# Altium PCB H-Bridge.PcbDoc
Units mil, origin at the board's own origin, x right, y up, seen from the top; angles counter-clockwise.
Board outline 2573 x 2749 mil, 2 copper layers (Top Layer, Bottom Layer); 15 components, 13 nets, 36 pads, 4 vias.
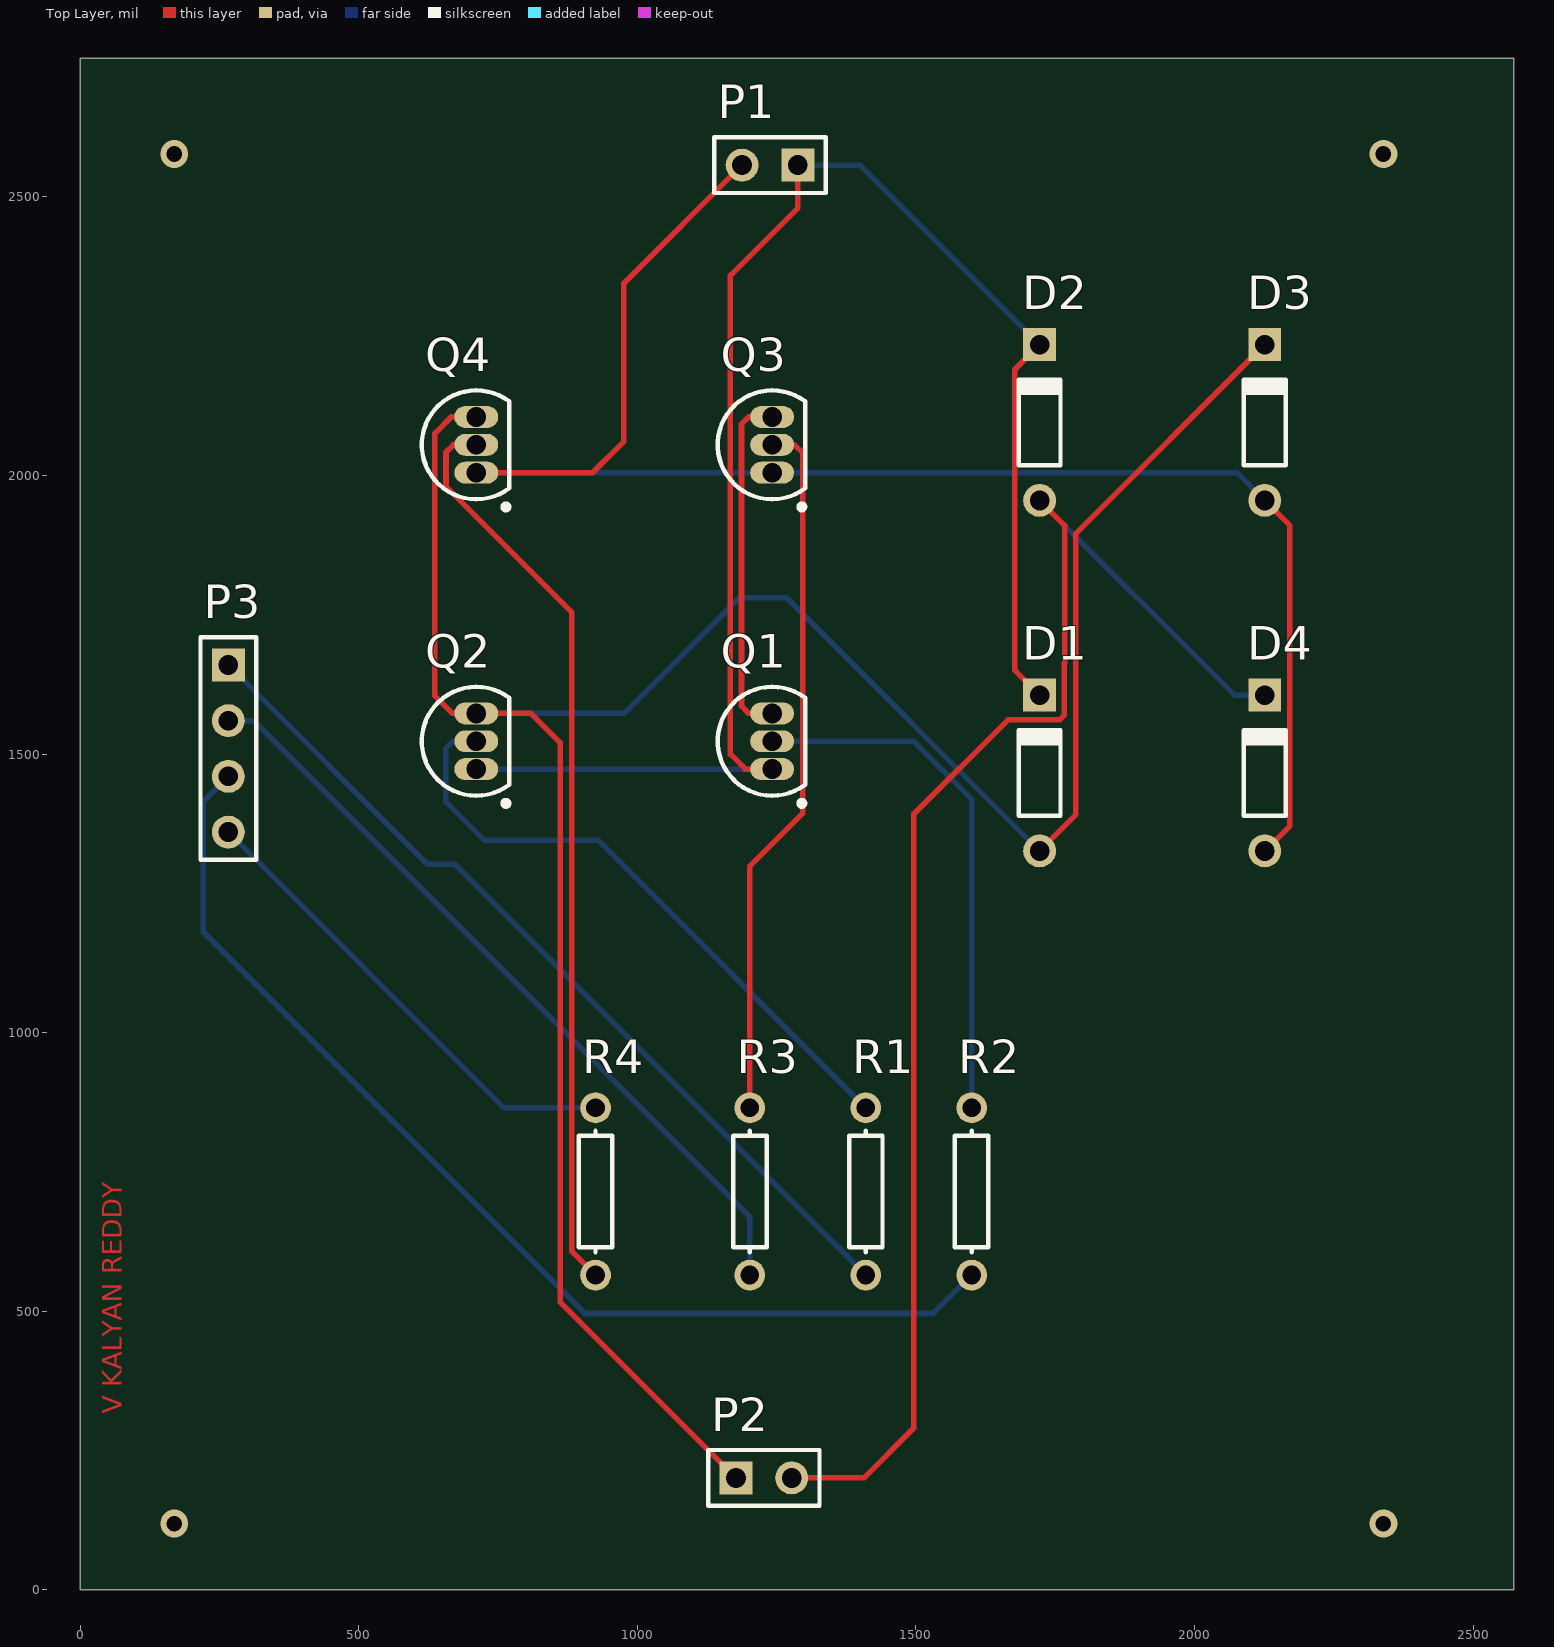
[diagram p0: Top Layer view]
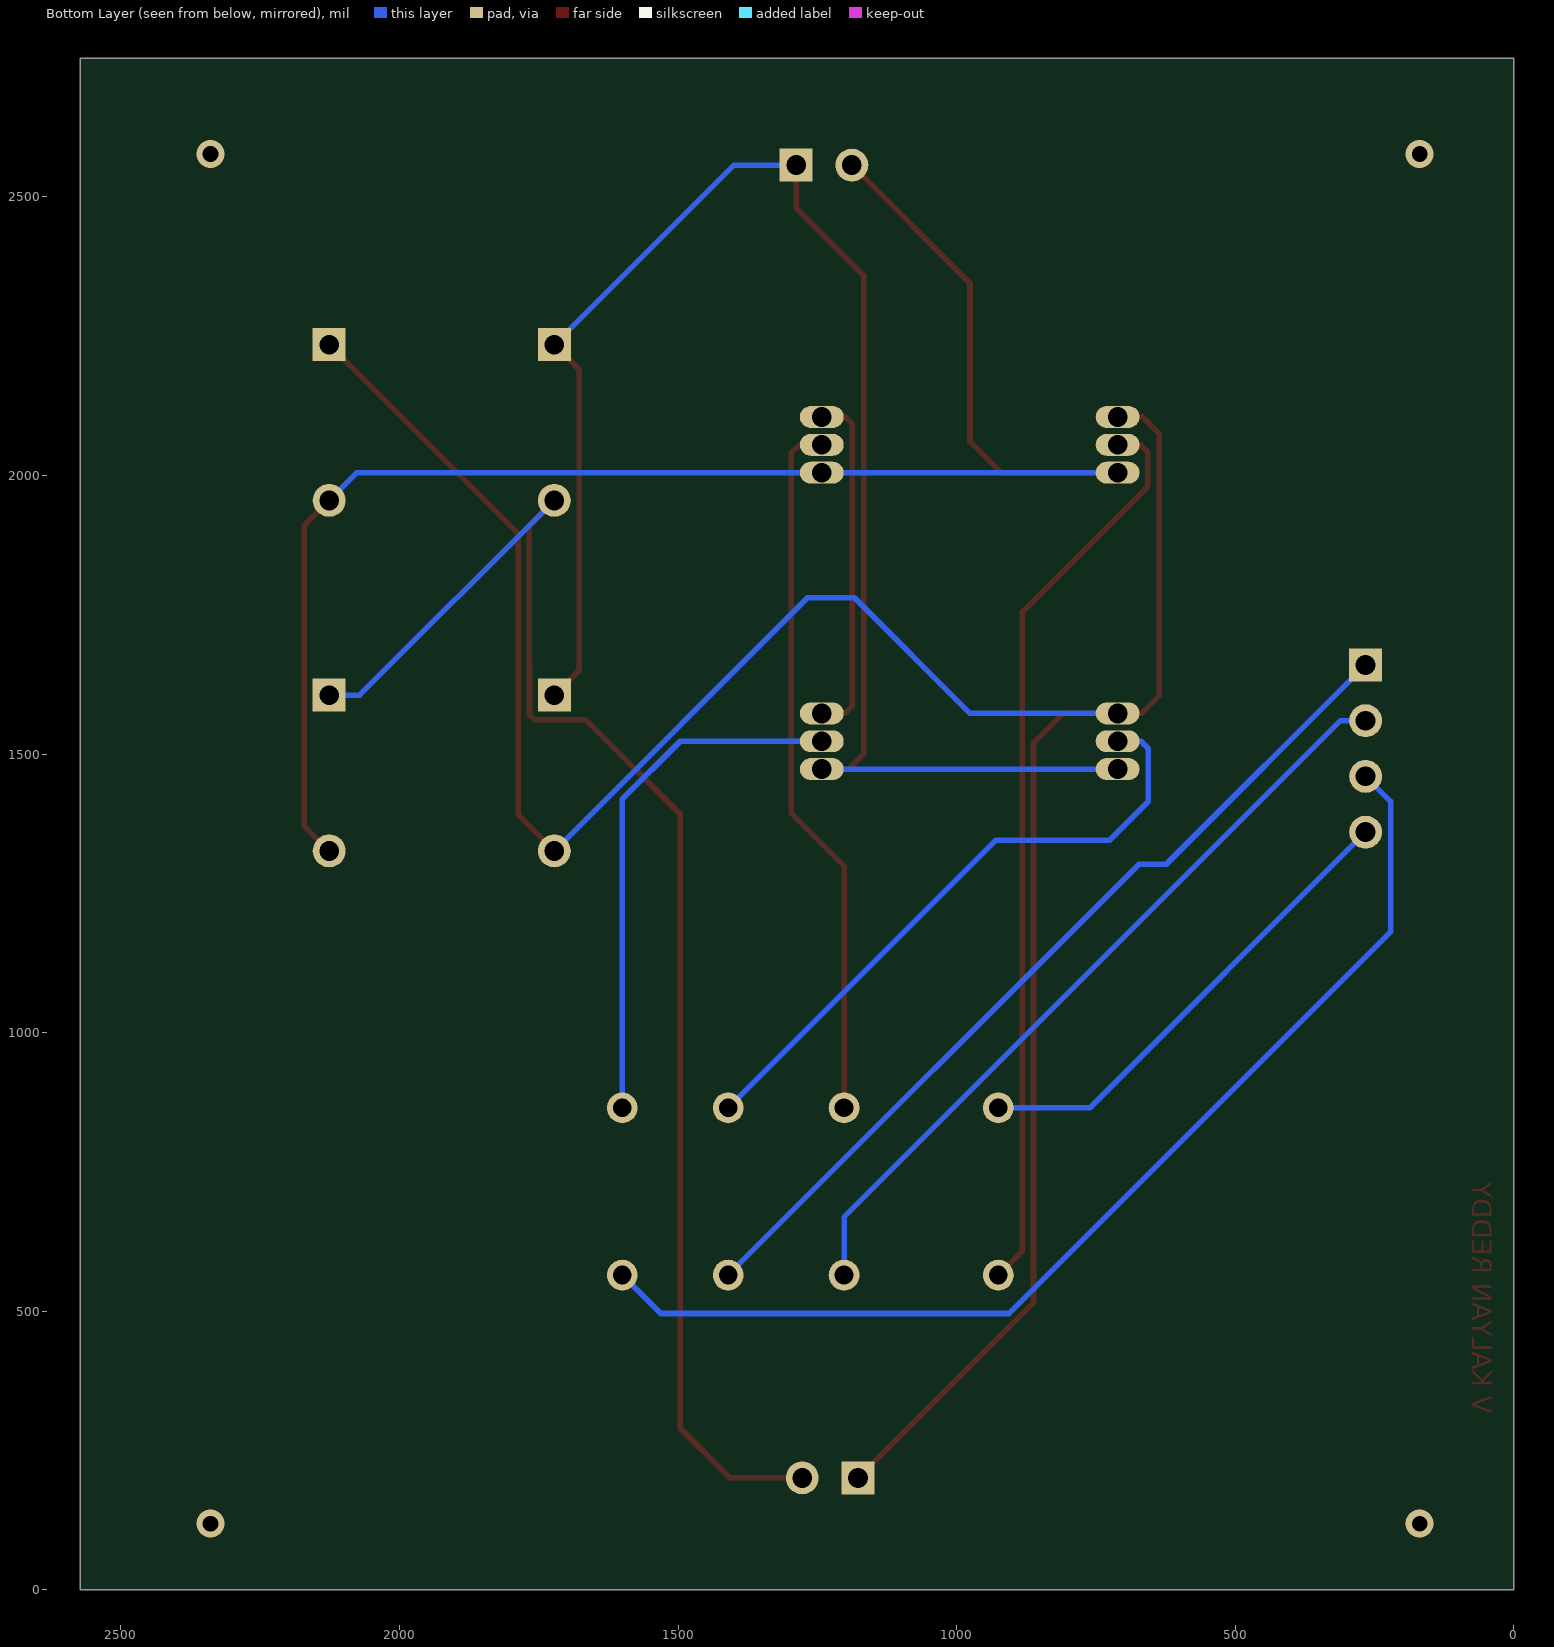
[diagram p1: Bottom Layer view, seen from below]

## Layer stack, top to bottom
Top Solder: solder mask 0.4, Solder Resist, Dk 3.5
Top Layer: signal copper 1.4
Dielectric 1: dielectric 12.6, FR-4, Dk 4.8
Bottom Layer: signal copper 1.4
Bottom Solder: solder mask 0.4, Solder Resist, Dk 3.5

## Board outline
0,0 2573,0 2573,2749 0,2749

## Design rules (kind name [scope] priority, off if disabled: settings)
Clearance [All] p1: gap=10 ignorepadtopadclearanceinfootprint=FALSE except(0: Arc-Hole Track-Hole SMDPad-Hole THPad-Hole Via-Hole Fill-Hole Poly-Hole Region-Hole Text-Hole)
PolygonConnect [All] p1: connectstyle=Relief reliefconductorwidth=10 reliefentries=4 polygonreliefangle="90 Angle" airgapwidth=10
RoutingVias [All] p1: holewidth=28 width=50 viastyle="Through Hole" minholewidth=28 minwidth=50 maxholewidth=28 maxwidth=50
SolderMaskExpansion [All] p1: expansion=4 istentingtop=FALSE
Width [All] p1: maxlimit=10 minlimit=10 preferedwidth=10
30 further rules are at their usual default settings.

## Components (designator, comment, footprint, x,y, rotation, side; value= is the part's Value field where it differs from the comment)
D1 "Diode 1N914" DO-35 1722,1466 r90 top
D2 "Diode 1N914" DO-35 1722,2095 r90 top
D3 "Diode 1N914" DO-35 2126,2095 r90 top
D4 "Diode 1N914" DO-35 2126,1466 r90 top
P1 "Header 2" HDR1X2 1288,2557 r180 top
P2 "Header 2" HDR1X2 1177,201 r0 top
P3 "Header 4" HDR1X4 266,1660 r270 top
Q1 "2N3906" TO-92A 1242,1523 r0 top
Q2 "2N3906" TO-92A 711,1523 r0 top
Q3 "2N3904" TO-92A 1242,2055 r0 top
Q4 "2N3904" TO-92A 711,2055 r0 top
R1 "Res1" AXIAL-0.3 1410,715 r90 top value=1K
R2 "Res1" AXIAL-0.3 1600,715 r270 top value=1K
R3 "Res1" AXIAL-0.3 1202,715 r270 top value=1K
R4 "Res1" AXIAL-0.3 925,715 r270 top value=1K

## Footprints (in the part's own frame and the unit in brackets; to place one, negate y for a bottom-side part, rotate by r counter-clockwise, add the part's x,y. Pads: shape width x height; smd on the part's side, far side on the other; paste and mask are expansions set on the pad)
AXIAL-0.3 [mm] "Axial Device, Thru-Hole; 2 Leads; 0.3 in Pin Spacing"
  round 1.4 hole 0.85: 1(-3.81,0) 2(3.81,0)
  silkscreen extent -2.77,-0.76 2.77,0.76
DO-35 [mm] "Diode, Axial; Body 3.8 x 1.9 mm (LxDia. max), Lead Dia. 0.53 mm (max)"
  round 1.5 hole 0.9: 1(-3.55,0)
  rect 1.5x1.5 hole 0.9: 2(3.55,0)
  silkscreen extent -1.95,-0.95 2.05,0.95
HDR1X2 [mm] "Connector; Header; 2 Position"
  rect 1.5x1.5 hole 0.9: 1(0,0)
  round 1.5 hole 0.9: 2(2.54,0)
  silkscreen extent -1.27,-1.27 3.81,1.27
HDR1X4 [mm] "Connector; Header; 4 Position"
  rect 1.5x1.5 hole 0.9: 1(0,0)
  round 1.5 hole 0.9: 2(2.54,0) 3(5.08,0) 4(7.62,0)
  silkscreen extent -1.27,-1.27 8.89,1.27
TO-92A [mm] "TO, Flat Index; 3 In-Line, Axial Leads; Body Dia. 4.5mm; Leads 0.51 x 0.48 mm (max)"
  oval 2x1 hole 0.9: 1(0,-1.27) 2(0,0) 3(0,1.27)
  silkscreen extent -2.48,-2.95 1.5,2.48, body extent -2.48,-2.5 1.5,2.5, height 6.86

## Part data
D1 D2 D3 D4: "High Conductance Fast Diode", Code_JEDEC=DO-204-AH, ComponentLink1Description="Manufacturer Link", ComponentLink1URL=http://www.fairchildsemi.com/, ComponentLink2Description=Datasheet, ComponentLink2URL=http://www.fairchildsemi.com/ds/1N%2F1N4448.pdf, DatasheetVersion=1997, LatestRevisionDate=17-Jul-2002, LatestRevisionNote="Re-released for DXP Platform.", PackageDescription="Diode, Axial; Body 3.8 x 1.9 mm (LxDia. max), Lead Dia. 0.53 mm (max)", PackageReference=DO-35, Published=8-Jun-2000, Publisher="Altium Limited"
P1 P2: "Header, 2-Pin", LatestRevisionDate=17-Jul-2002, LatestRevisionNote="Re-released for DXP Platform.", Publisher="Altium Limited"
P3: "Header, 4-Pin", LatestRevisionDate=17-Jul-2002, LatestRevisionNote="Re-released for DXP Platform.", Publisher="Altium Limited"
Q1 Q2: "PNP General Purpose Amplifier", ComponentLink1Description="Manufacturer Link", ComponentLink1URL=http://www.fairchildsemi.com/, ComponentLink2Description=Datasheet, ComponentLink2URL=http://www.fairchildsemi.com/ds/2N%2F2N3906.pdf, DatasheetVersion=1997, LatestRevisionDate=15-Jan-2003, LatestRevisionNote="PCB Footprint 'BCY-W3/D4.7' replaced", PackageDescription="TO, Flat Index; 3 In-Line, Axial Leads; Body Dia. 4.5mm; Leads 0.51 x 0.48 mm (max)", PackageReference=TO-92A, PackageVersion=Sep-1998, Published=8-Jun-2000, Publisher="Altium Limited"
Q3 Q4: "NPN General Purpose Amplifier", ComponentLink1Description="Manufacturer Link", ComponentLink1URL=http://www.fairchildsemi.com/, ComponentLink2Description=Datasheet, ComponentLink2URL=http://www.fairchildsemi.com/ds/2N%2F2N3904.pdf, DatasheetVersion=1997, LatestRevisionDate=15-Jan-2003, LatestRevisionNote="PCB Footprint 'BCY-W3/D4.7' replaced", PackageDescription="TO, Flat Index; 3 In-Line, Axial Leads; Body Dia. 4.5mm; Leads 0.51 x 0.48 mm (max)", PackageReference=TO-92A, PackageVersion=Sep-1998, Published=8-Jun-2000, Publisher="Altium Limited"
R1 R2 R3 R4: "Resistor", LatestRevisionDate=17-Jul-2002, LatestRevisionNote="Re-released for DXP Platform.", PackageDescription="Axial Device, Thru-Hole; 2 Leads; 0.3 in Pin Spacing", PackageReference=AXIAL-0.3, Published=8-Jun-2000, Publisher="Altium Limited"

## Via types
v1: diameter 50, hole 28, Top Layer to Bottom Layer, 4 vias

## Nets (pads, with @x,y where several pads share a name; then routed paths per layer and width w, separated by ;. In a path a pad name is that pad's centre, name@x,y a point inside that pad or via, vN(x,y) a via of type N, cw(c..) or ccw(c..) an arc to the next point about the centre after c; other vN are vias at no path point)
+5V: D1.2 D2.2 P1.1 Q1.1 Q2.1 | length 2958.1
  Top Layer w10: Q1.1 1194,1473 1167,1500 1167,2359 1288,2480 P1.1 ; D1.2 1677,1650.76 1677,2189.76 D2.2
  Bottom Layer w10: Q2.1 Q1.1 ; P1.1 1399.76,2557 D2.2
anti_clk_dir_1: P3.3 R2.2 | length 1989
  Bottom Layer w10: P3.3 221,1415 221,1181 906,496 1531,496 R2.2
anti_clk_dir_2: P3.4 R4.1 | length 864
  Bottom Layer w10: P3.4 761,865 R4.1
clk_dir_1: P3.1 R1.1 | length 1597.6
  Bottom Layer w10: P3.1 623.77,1302.23 672.77,1302.23 R1.1
clk_dir_2: P3.2 R3.2 | length 1409.1
  Bottom Layer w10: P3.2 311,1560 1202,669 R3.2
GND: D3.1 D4.1 P1.2 Q3.1 Q4.1 | length 2973.9
  Top Layer w10: Q4.1 920,2005 976,2061 976,2345 P1.2 ; D4.1 2171,1371.24 2171,1910.24 D3.1
  Bottom Layer w10: Q4.1 Q3.1 2076.24,2005 D3.1
motor1: D1.1 D3.2 P2.1 Q2.3 Q4.3 | length 4628.6
  Top Layer w10: Q4.3 666,2105 636.63,2075.63 636.63,1604.37 668,1573 Q2.3 809,1573 862,1520 862,516 P2.1 ; D1.1 1787,1391.24 1787,1895.76 D3.2
  Bottom Layer w10: Q2.3 976,1573 1183.5,1780.5 1267.74,1780.5 D1.1
motor2: D2.1 D4.2 P2.2 | length 2654.9
  Top Layer w10: P2.2 1407,201 1496,290 1496,1392 1665.24,1561.24 1757.74,1561.24 1766.53,1570.02 1766.53,1662.53 1767,1663 1767,1910.24 D2.1
  Bottom Layer w10: D2.1 2071.47,1605.76 D4.2
NetQ1_2: Q1.2 R2.1 | length 955.1
  Bottom Layer w10: Q1.2 1496,1523 1600,1419 R2.1
NetQ1_3: Q1.3 Q3.3 | length 626.8
  Top Layer w10: Q1.3 1200,1573 1187,1586 1187,2092 1200,2105 Q3.3
NetQ2_2: Q2.2 R1.2 | length 1137.2
  Bottom Layer w10: Q2.2 669,1523 656,1510 656,1415 726,1345 930,1345 R1.2
NetQ3_2: Q3.2 R3.1 | length 1275.6
  Top Layer w10: R3.1 1202,1299 1297,1394 1297,2040 1282,2055 Q3.2
NetQ4_2: Q4.2 R4.2 | length 1647.7
  Top Layer w10: Q4.2 670,2055 656.63,2041.63 656.63,1980 882,1754.63 882,608 R4.2
copper on no net:
  other v1: 169,119 2339,119 169,2577 2339,2577

## Polygon pours and split planes (outlines as drawn)
GND on Mechanical 1 "NONET_L-01_P-001" (solid): 0,0 2573,0 2573,2749 0,2749
GND on Mechanical 13 "NONET_L-01_P-001" (solid): 0,0 2573,0 2573,2749 0,2749

## Other copper
Top Layer:
  text "V KALYAN REDDY" at 86,316 h60 r90